# Altium PCB TEST.PcbDoc
Units mm, origin at the board's own origin, x right, y up, seen from the top; angles counter-clockwise.
Board outline 80.01 x 80.01 mm, 2 copper layers (Top Layer, Bottom Layer); 30 components, 30 nets, 145 pads, 219 vias.
Unrouted connection lines stored in the file: 1.
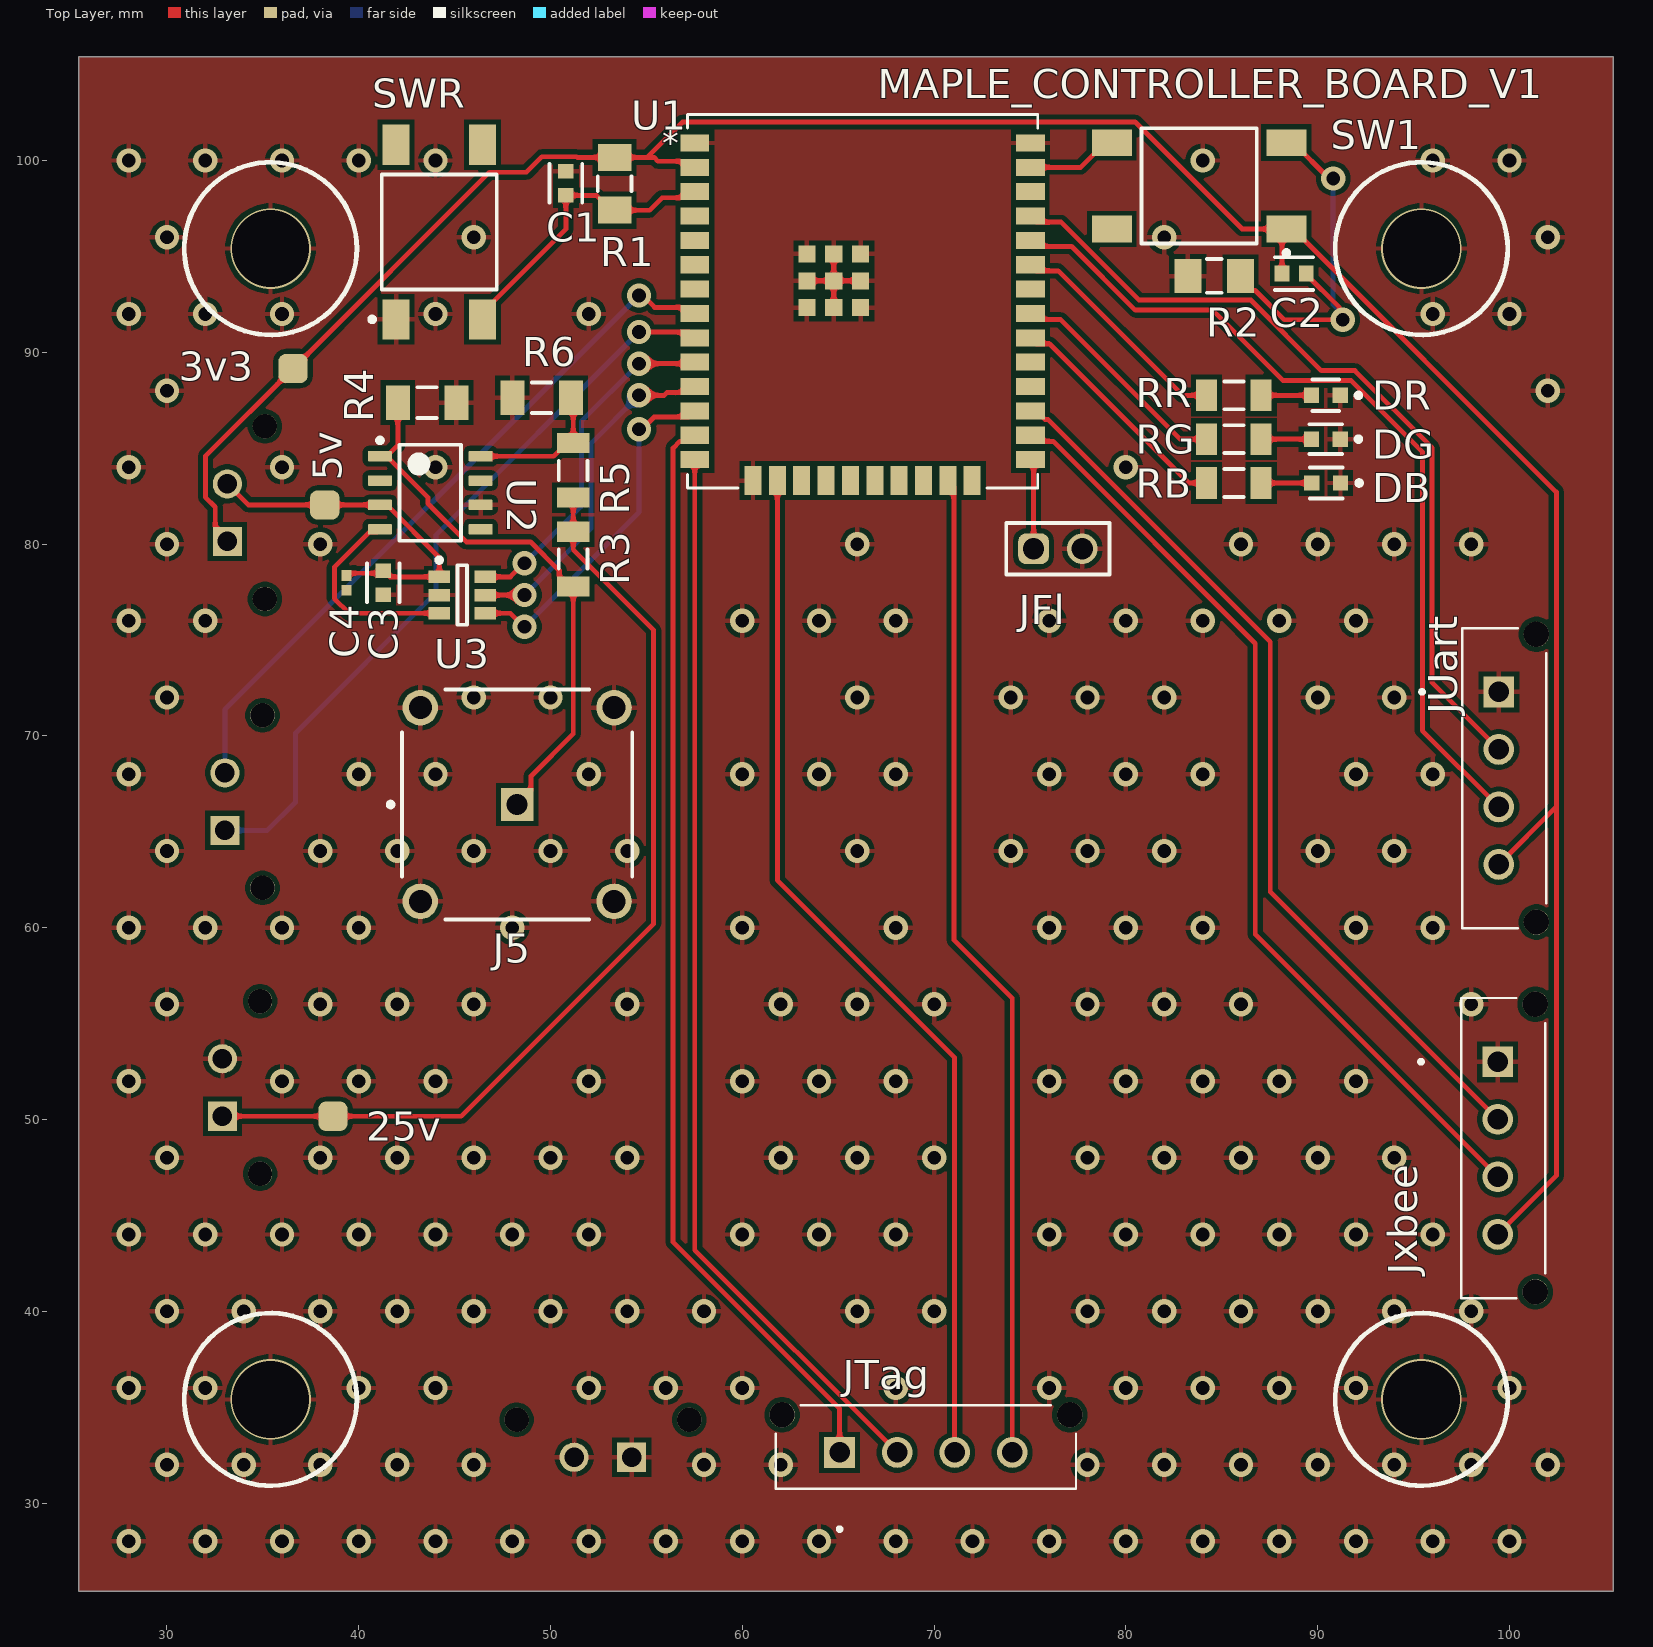
[diagram p0: Top Layer view]
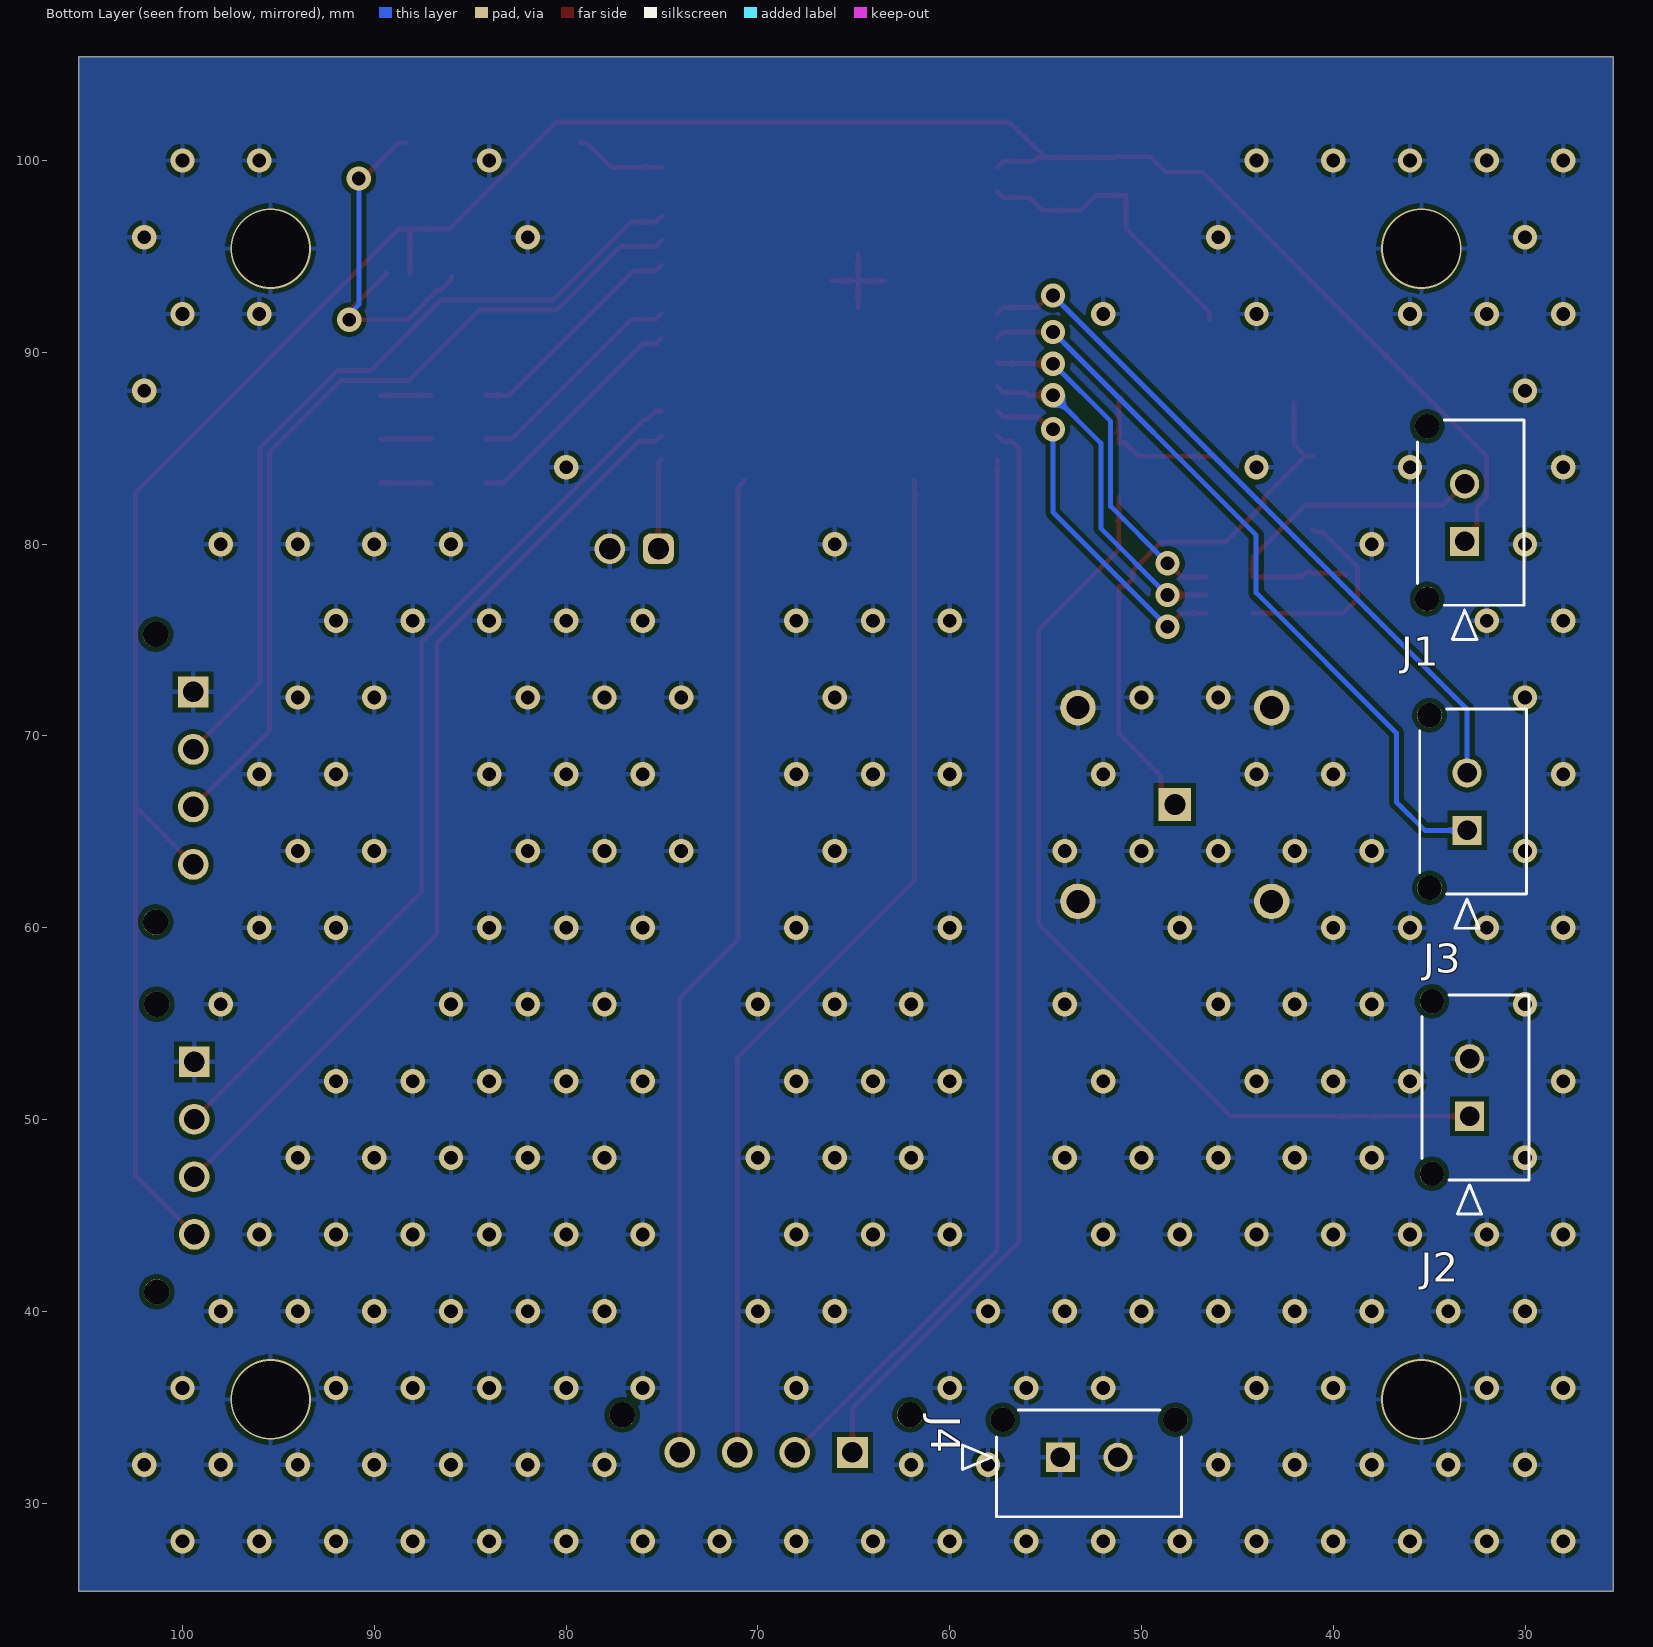
[diagram p1: Bottom Layer view, seen from below]
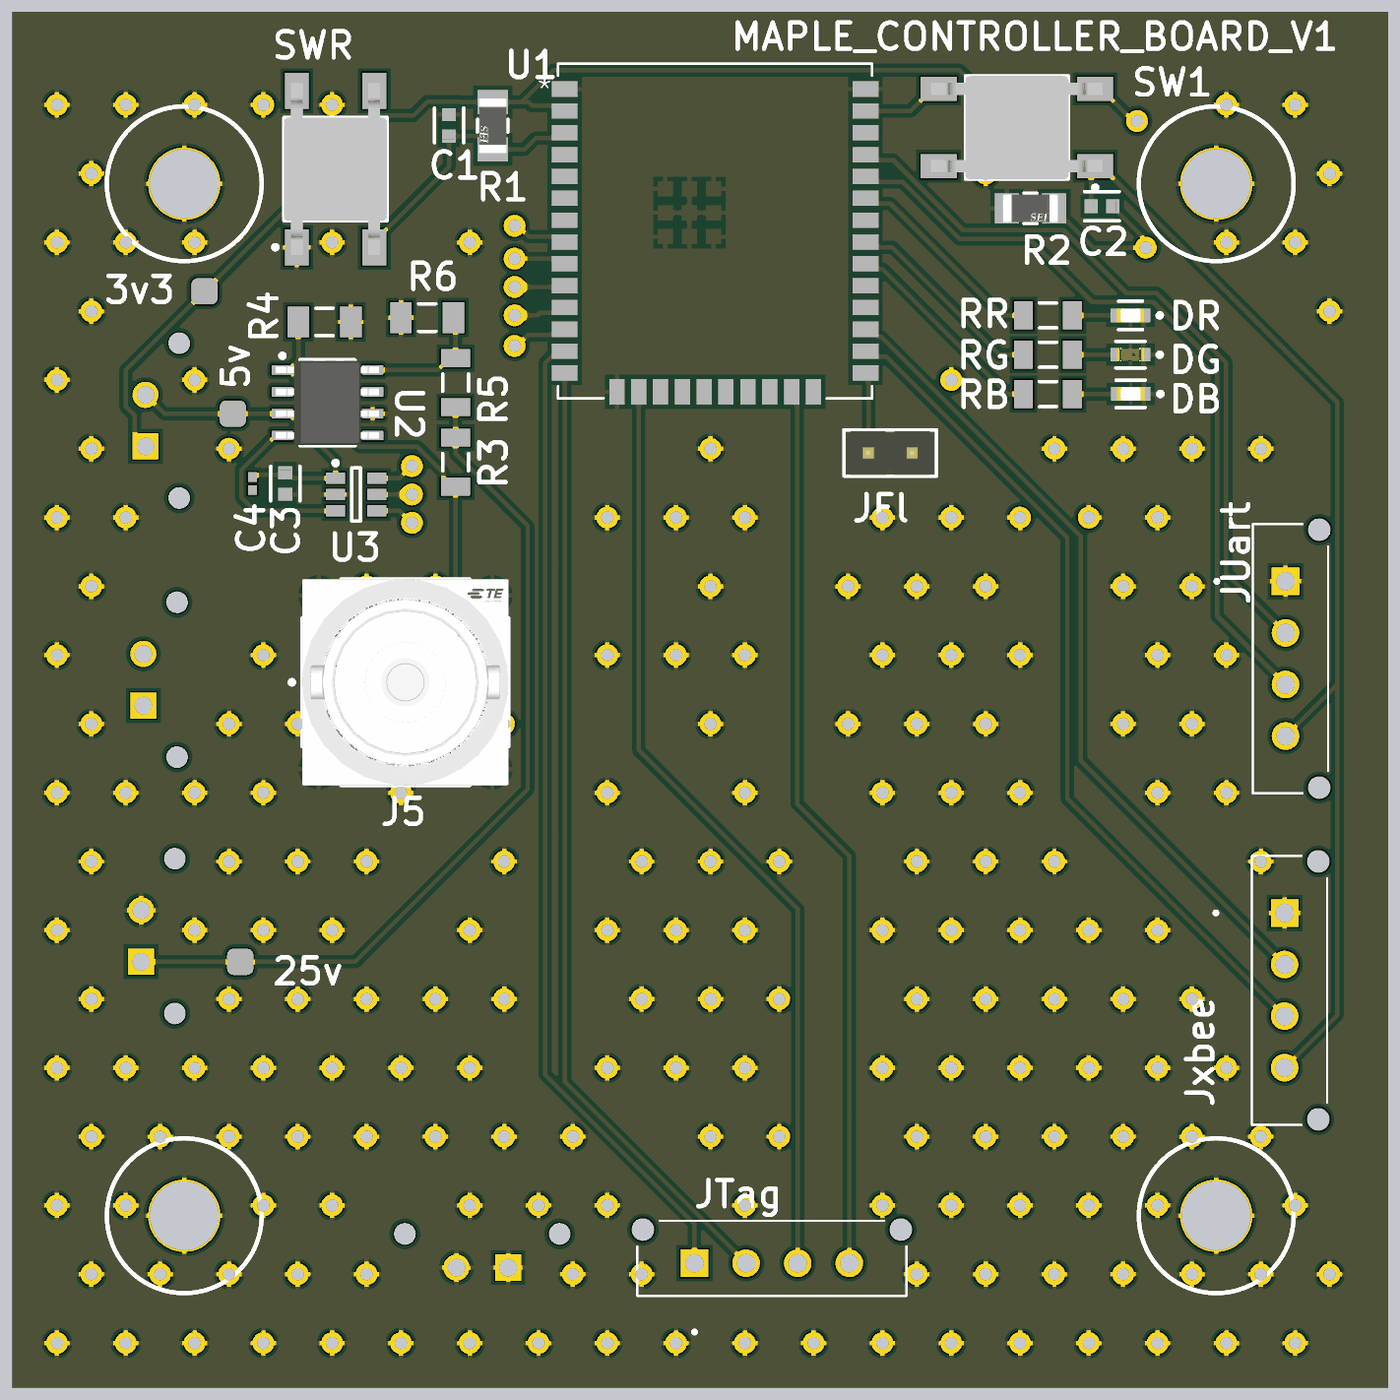
[diagram p2: 3D render of the assembled board from above, using the file's embedded part models]

## Layer stack, top to bottom
Top Solder: solder mask 0.0102, Solder Resist, Dk 3.5
Top Layer: signal copper 0.0356
Dielectric 1: dielectric 0.32, FR-4, Dk 4.8
Bottom Layer: signal copper 0.0356
Bottom Solder: solder mask 0.0102, Solder Resist, Dk 3.5

## Board outline
25.4,25.4 105.41,25.4 105.41,105.41 25.4,105.41

## Design rules (kind name [scope] priority, off if disabled: settings)
Clearance [All] p1: gap=0.254 ignorepadtopadclearanceinfootprint=FALSE except(0: Arc-Hole Track-Hole SMDPad-Hole THPad-Hole Via-Hole Fill-Hole Poly-Hole Region-Hole Text-Hole)
PolygonConnect [All] p1: connectstyle=Relief reliefconductorwidth=0.254 reliefentries=4 polygonreliefangle="90 Angle" airgapwidth=0.254
RoomDefinition MAPLE_CDH_Periph [InComponentClass('MAPLE_CDH_Periph')] p1: confinementstyle=ConfineIn formatcopy=TRUE lockcomponents=FALSE outline 0,0 50.8,0 50.8,25.4 0,25.4
RoomDefinition MAPLE_CDH_Cntrlr [InComponentClass('MAPLE_CDH_Cntrlr')] p2: confinementstyle=ConfineIn formatcopy=TRUE lockcomponents=FALSE outline 0,0 50.8,0 50.8,25.4 0,25.4
RoutingVias [All] p1: holewidth=0.711 width=1.27 viastyle="Through Hole" minholewidth=0.711 minwidth=1.27 maxholewidth=0.711 maxwidth=1.27
SolderMaskExpansion [All] p1: expansion=0.102 istentingtop=FALSE
Width [All] p1: maxlimit=0.254 minlimit=0.254 preferedwidth=0.254
30 further rules are at their usual default settings.

## Classes and differential pairs
component class MAPLE_CDH_Cntrlr: U1

## Components (designator, comment, footprint, x,y, rotation, side; value= is the part's Value field where it differs from the comment)
C1 "CL10A105KA8NNNC" FP-CL10-IPC_C 50.8,98.806 r270 top
C2 "CL10A105KA8NNNC" FP-CL10-IPC_C 88.765,94.107 r0 top
C3 "CL10A105KA8NNNC" FP-CL10-IPC_C 41.275,77.978 r270 top
C4 "CL03A104KQ3NNNC" CAPC0603X33X15ML03T05 39.37,77.978 r90 top
DB "LTST-C193TBKT-5A" FP-LTST-C193TBKT-5A-MFG 90.436,83.185 r180 top
DG "LTST-C193KGKT-5A" FP-LTST-C193KGKT-5A-MFG 90.424,85.471 r180 top
DR "LTST-C193KRKT-5A" FP-LTST-C193KRKT-5A-MFG 90.424,87.757 r180 top
J1 "436500227" CON_436500227_MOL 33.147,80.137 r270 bottom
J2 "436500227" CON_436500227_MOL 32.893,50.165 r270 bottom
J3 "436500227" CON_436500227_MOL 33.02,65.072 r270 bottom
J4 "436500227" CON_436500227_MOL 54.229,32.385 r0 bottom
J5 "1-1337445-0" FP-1-1337445-0-MFG 48.26,66.421 r0 top
JFl "61300211121" 61300211121 76.454,79.756 r0 top
JTag "0436500415" MOLEX_0436500415 69.572,32.639 r180 top
JUart "0436500415" MOLEX_0436500415 99.441,67.794 r90 top
Jxbee "0436500415" MOLEX_0436500415 99.386,48.507 r90 top
R1 "RMCF1206FT10K0" FP-RMCF1206-IPC_B 53.34,98.785 r270 top
R2 "RMCF1206FT10K0" FP-RMCF1206-IPC_B 84.603,93.98 r0 top
R3 "" RESC3116X65X40NL10T20 51.181,79.22 r90 top
R4 "" RESC3116X65X40ML10T20 43.561,87.376 r180 top
R5 "RC1206FR-0724K9L" RESC3116X65X40NL10T20 51.181,83.848 r270 top
R6 "RC1206FR-07100KL" RESC3116X65X40ML10T20 49.53,87.63 r0 top
RB "ERJ-8ENF1000V" RESC3216X70X50NL05T20 85.626,83.185 r0 top
RG "ERJ-8GEYJ271V" RESC3216X70X50NL05T20 85.626,85.471 r0 top
RR "ERJ-8GEYJ271V" RESC3216X70X50NL05T20 85.626,87.757 r0 top
SW1 "FSM4JSMA" TECO-FSM4JSMA_V 83.82,98.679 r270 top
SWR "FSM4JSMA" TECO-FSM4JSMA_V 44.196,96.266 r180 top
U1 "ESP32-WROOM-32UE-N16" ESP32-32UE_EXP 66.271,92.66 r0 top
U2 "THS4505DR" D0008A_L 43.73,82.677 r0 top
U3 "ADC121C027CIMK" MK06A_N 45.396,77.343 r0 top

## Footprints (in the part's own frame and the unit in brackets; to place one, negate y for a bottom-side part, rotate by r counter-clockwise, add the part's x,y. Pads: shape width x height; smd on the part's side, far side on the other; paste and mask are expansions set on the pad)
61300211121 [mm] "Pin Header, pitch 2.54 mm, THT, Vertical, single row, 2p"
  rrect50% 1.6x1.6 hole 1.1: 1(-1.27,0)
  round 1.6 hole 1.1: 2(1.27,0)
  silkscreen extent -2.69,-1.34 2.69,1.34, body extent -2.54,-1.27 2.54,1.27, height 8.57
CAPC0603X33X15ML03T05 [mm] "Chip Capacitor, 2-Leads, Body 0.60x0.30mm, IPC Low Density"
  rect 0.56x0.52 smd: 1(-0.38,0) 2(0.38,0)
  body extent -0.31,-0.17 0.32,0.16, height 0.33
CON_436500227_MOL [mm]
  rect 1.52x1.52 / inner round 1.524 / far side rect 1.52x1.52 hole 1.02 paste-0.76 mask+0.076: 1(0,0)
  round 1.52 / inner round 1.524 / far side round 1.52 hole 1.02 paste-0.76 mask+0.076: 2(-3,0)
  round 1.27 / inner round 1.524 / far side round 1.27 hole 1.27 unplated paste-0.635 mask+0.076: M1(3,-1.96) M2(-6,-1.96)
  silkscreen extent -6.33,-2.47 5.1,3.1
D0008A_L [mm] "SOIC, 8-Leads, Body 5x4mm, Pitch 1.27mm, IPC High Density"
  rrect18% 1.25x0.55 smd: 1(-2.625,1.905) 2(-2.625,0.635) 3(-2.625,-0.635) 4(-2.625,-1.905) 5(2.625,-1.905) 6(2.625,-0.635) 7(2.625,0.635) 8(2.625,1.905)
  silkscreen extent -2.75,-2.5 1.6,2.85, body extent -3,-2.45 3,2.45, height 1.63
ESP32-32UE_EXP [mil]
  rect 59x35 smd paste+0 mask+0: 1(-344.49,325) 2(-344.49,275) 3(-344.49,225) 4(-344.49,175) 5(-344.49,125) 6(-344.49,75) 7(-344.49,25) 8(-344.49,-25) 9(-344.49,-75) 10(-344.49,-125) 11(-344.49,-175) 12(-344.49,-225) 13(-344.49,-275) 14(-344.49,-325) 25(344.49,-325) 26(344.49,-275) 27(344.49,-225) 28(344.49,-175) 29(344.49,-125) 30(344.49,-75) 31(344.49,-25) 32(344.49,25) 33(344.49,75) 34(344.49,125) 35(344.49,175) 36(344.49,225) 37(344.49,275) 38(344.49,325)
  rect 35x59 smd paste+0 mask+0: 15(-225,-368.11) 16(-175,-368.11) 17(-125,-368.11) 18(-75,-368.11) 19(-25,-368.11) 20(25,-368.11) 21(75,-368.11) 22(125,-368.11) 23(175,-368.11) 24(225,-368.11)
  rect 35x35 smd paste-17.5 mask-17.5: 39(-59.22,42.08) 40(-114.34,97.2) 41(-114.34,42.08) 42(-114.34,-13.04) 43(-59.22,-13.04) 44(-59.22,97.2) 45(-4.11,97.2) 46(-4.11,42.08) 47(-4.11,-13.04)
  silkscreen extent -360,-383 359,383
FP-1-1337445-0-MFG [mm]
  rect 1.7x1.7 hole 1.1 paste-1000 mask+0: 1(0,0)
  round 1.85 hole 1.2 paste-1000 mask+0: 2(-5.05,5.05) 3(5.05,5.05) 4(-5.05,-5.05) 5(5.05,-5.05)
  silkscreen extent -6.72,-6 6,6, body extent -6.1,-6.1 6.1,6.1, height 0.25
FP-CL10-IPC_C [mm]
  rect 0.758x0.812 smd paste+0 mask+0: 1(-0.627,0) 2(0.627,0)
  silkscreen extent -1.01,-0.85 1.01,0.85, body extent -1.11,-0.55 1.11,0.55, height 0.25
FP-LTST-C193KGKT-5A-MFG [mm]
  rect 0.8x0.8 smd paste+0 mask+0: 1(-0.75,0) 2(0.75,0)
  silkscreen extent -1.83,-0.78 0.85,0.78, body extent -1.25,-0.55 1.25,0.55, height 0.25
FP-LTST-C193KRKT-5A-MFG [mm]
  rect 0.8x0.8 smd paste+0 mask+0: 1(-0.75,0) 2(0.75,0)
  silkscreen extent -1.83,-0.82 0.7,0.82, body extent -1.25,-0.55 1.25,0.55, height 0.25
FP-LTST-C193TBKT-5A-MFG [mm]
  rect 0.8x0.8 smd paste+0 mask+0: 1(-0.75,0) 2(0.75,0)
  silkscreen extent -1.85,-0.8 0.85,0.8, body extent -1.25,-0.55 1.25,0.55, height 0.25
FP-RMCF1206-IPC_B [mm]
  rect 1.404x1.758 smd paste+0 mask+0: 1(-1.376,0) 2(1.376,0)
  silkscreen extent -0.37,-0.88 0.37,0.88, body extent -2.33,-1.13 2.33,1.13, height 0.25
MK06A_N [mm] "SOT23, 6-Leads, Body 3.0x1.7mm, Pitch 0.95mm, Lead Span 2.9mm, IPC Medium Density"
  rect 1.1x0.65 smd: 1(-1.2,0.95) 2(-1.2,0) 3(-1.2,-0.95) 4(1.2,-0.95) 5(1.2,0) 6(1.2,0.95)
  silkscreen extent -1.32,-1.55 0.25,1.95, body extent -0.87,-1.53 0.87,1.54, height 1
MOLEX_0436500415 [mm]
  rect 1.605x1.605 hole 1.07: 1(4.5,0)
  round 1.605 hole 1.07: 2(1.5,0) 3(-1.5,0) 4(-4.5,0)
  round 1.32 hole 1.32 unplated: ""(-7.5,-1.96) ""(7.5,-1.96)
  silkscreen extent -7.83,-2.47 7.83,4.1
RESC3116X65X40ML10T20 [mm] "Chip Resistor, 2-Leads, Body 3.10x1.60mm, IPC Low Density"
  rect 1.25x1.8 smd: 1(-1.525,0) 2(1.525,0)
  silkscreen extent -0.5,-0.8 0.5,0.8, body extent -1.6,-0.85 1.6,0.85, height 0.65
RESC3116X65X40NL10T20 [mm] "Chip Resistor, 2-Leads, Body 3.10x1.60mm, IPC Medium Density"
  rect 1.05x1.7 smd: 1(-1.425,0) 2(1.425,0)
  silkscreen extent -0.5,-0.75 0.5,0.75, body extent -1.6,-0.85 1.6,0.85, height 0.65
RESC3216X70X50NL05T20 [mm] "Chip Resistor, 2-Leads, Body 3.20x1.60mm, IPC Medium Density"
  rect 1.1x1.65 smd: 1(-1.425,0) 2(1.425,0)
  silkscreen extent -0.5,-0.73 0.5,0.73, body extent -1.63,-0.82 1.62,0.82, height 0.7
TECO-FSM4JSMA_V [mm] "SMD, 4-Leads, Body 6x6mm, Pitch 4.5mm"
  rect 1.4x2.1 smd: 1(2.25,4.55) 2(2.25,-4.55) 3(-2.25,4.55) 4(-2.25,-4.55)
  silkscreen extent -3,-3 3.62,4.68, body extent -3,-5 3,5, height 5.08

## Part data
C1 C2 C3: library part CMP-13271-004127-1, "Cap Ceramic 1uF 25V X5R ±10% Pad SMD 0603 +85°C T/R", Capacitance=1uF, Case Code (Imperial)=0603, Case Code (Metric)=1608, Dielectric=X5R, Max Operating Temperature=85°C, Min Operating Temperature=-55°C, Package Quantity=1, Tolerance=10%, Voltage=25V, Case/Package=0603, Contact Plating=Tin, Depth=0.8mm, Height=0.8mm, Lead Free="Lead Free", Length=1.6mm, Material=Ceramic, Mount="Surface Mount", Packaging="Tape and Reel", Radiation Hardening=No, Thickness=0.035inch, Voltage Rating=25V, Voltage Rating (DC)=25V, Width=0.031inch
C4: library part CMP-2010-00674-1, Manufacturer=Samsung, Part Number=CL03A104KQ3NNNC
DB: library part CMP-2000-06624-2, "LED BLUE CLEAR CHIP SMD", Case Code (Imperial)=0603, Case Code (Metric)=1608, Color=Blue, Forward Current=20mA, Forward Voltage=2.8V, Lens Color=Colorless, Max Operating Temperature=80°C, Min Operating Temperature=-20°C, Package Quantity=1, Power Dissipation=76mW, Reverse Voltage=5V, Test Current=5mA, Case/Package=0603, Depth=0.8mm, Dominant Wavelength=475nm, Height=0.35mm, Illumination Color=Blue, Lead Free="Lead Free", Length=1.6mm, Lens Style=Diffused, Lens Transparency=Clear, Luminous Intensity=15mcd, Mount="Surface Mount", Number of Elements=1, Number of LEDs=1, Number of Pins=2, Packaging="Tape and Reel", Radiation Hardening=No, RoHS Compliant=Yes, Viewing Angle=130°, Width=0.8mm
DG: library part CMP-2000-06622-2, "LED GREEN CLEAR CHIP SMD", Case Code (Imperial)=0603, Case Code (Metric)=1608, Color=Green, Forward Current=30mA, Forward Voltage=2.3V, Lens Color=Colorless, Max Operating Temperature=85°C, Min Operating Temperature=-55°C, Package Quantity=3000, Power Dissipation=75mW, Reverse Voltage=5V, Test Current=5mA, Case/Package=0603, Depth=0.8mm, Dominant Wavelength=576.5nm, Height=0.35mm, Illumination Color=Green, Lead Free="Lead Free", Length=1.6mm, Lens Style=Diffused, Lens Transparency=Clear, Luminous Intensity=28mcd, Mount="Surface Mount", Number of Elements=1, Number of LEDs=1, Number of Pins=2, Packaging="Tape and Reel", Power Rating=75mW, Radiation Hardening=No, Viewing Angle=130°, Width=0.8mm
DR: library part CMP-2000-06623-2, "LED RED CLEAR CHIP SMD", Case Code (Imperial)=0603, Case Code (Metric)=1608, Color=Red, Forward Current=5mA, Forward Voltage=2.3V, Lens Color=Colorless, Max Operating Temperature=85°C, Min Operating Temperature=-55°C, Package Quantity=3000, Power Dissipation=50mW, Reverse Voltage=5V, Case/Package=0603, Depth=0.8mm, Dominant Wavelength=631nm, Height=0.35mm, Illumination Color=Red, Lead Free="Lead Free", Length=1.6mm, Lens Style=Diffused, Lens Transparency=Clear, Luminous Intensity=45mcd, Mount="Surface Mount", Number of Elements=1, Number of LEDs=1, Number of Pins=2, Packaging="Tape and Reel", Radiation Hardening=No, Test Current=5mA, Viewing Angle=130°, Width=0.8mm
J1 J2 J3 J4: "No Description Available", Mfr_Name="Molex Connector Corporation", Copyright="Copyright (C) 2023 Ultra Librarian. All rights reserved.", Digi-Key_Part_Number_1=WM10656-ND, Manufacturer_Part_Number=436500227, RefDes=RefDes, Type=DEV
J5: library part CMP-03357-000006-1, "CONN BNC JACK STR 50 OHM PCB", Dielectric Material=PTFE, Frequency=4GHz, Insulation Resistance=5GR, Max Operating Temperature=165°C, Min Operating Temperature=-65°C, Operating Frequency="0 to 4Hz", Package Quantity=50, Body Material=Brass, Body Plating=Silver, Connector Type=BNC, Contact Material=Brass, Contact Plating=Silver, Depth=12mm, ELV=Compliant, Fastening Type=Bayonet, Gender=Female, Impedance=50R, Insulation Material=Polytetrafluoroethylene, Length=12mm, Material=Brass, Max Frequency=4GHz, Mount="Through Hole", Number of Positions=1, Orientation=Straight, Packaging=Bag, PCB Mount Retention=With, PCB Mounting Orientation=Vertical, PCB Thickness=0.126inch, Radiation Hardening=No, RoHS Compliant=Yes, Sealable="No (Without)", Series=BNC, Termination=Solder
JFl: library part CMP-1712-00002-5, Color=Black, Contact Resistance=20mΩ, Current Rating=3A, Max Operating Temperature=125°C, Min Operating Temperature=-40°C, Operating Supply Voltage=250V, Connector Type="Male Pin", Contact Gender=Male, Contact Material=Copper, Contact Mating Length=5.9944mm, Contact Plating=Gold, Gender=Male, Height=8.94mm, Housing Material=PBT, Lead Free="Lead Free", Lead Pitch=2.54mm, Mount="Through Hole", NexarPartId=20081794, Number Of Contacts=2, Number of Pins=2, Number of Positions=2, Number Of Rows=1, Orientation=Vertical, Packaging=Bulk, Pitch=2.54mm, REACH SVHC="No SVHC", RoHS=Compliant, Termination="Through Hole", Voltage Rating=250V
JTag JUart Jxbee: "Connector Header Through Hole 4 position 0.118 (3.00mm)", Package=None, Availability=Unavailable, MF=Molex, MP=0436500415, Price=None, SnapEDA_Link=https://www.snapeda.com/parts/0436500415/Molex/view-part/425083/?ref=snap
R1 R2: library part CMP-26527-000151-1, "10kΩ ±1% 0.25W 1206 Thick Film Chip Resistor AEC-Q200 compliant", Case Code (Imperial)=1206, Case Code (Metric)=3216, Max Operating Temperature=155°C, Max Power Dissipation=250mW, Min Operating Temperature=-55°C, Resistance=10kR, Resistor Type="Thick Film", Temperature Coefficient=100ppm/°C, Tolerance=1%, Case/Package=1206, Construction=Rectangular, Contact Plating=Tin, Depth=1.6mm, Features="Automotive AEC-Q200", Height=0.028inch, Lead Free="Lead Free", Length=3.2mm, Military Standard=Not, Mount="Surface Mount", Number of Terminations=2, Packaging="Tape and Reel", Power Rating=250mW, Radiation Hardening=No, RoHS Compliant=Yes, Series=RMCF, Size Code=1206, Width=0.063inch
R3: library part CMP-2003-03636-1, Manufacturer=Yageo, Part Number=RC1206FR-0724K9L
R4 R6: library part CMP-2100-03674-1, "Chip Resistor, 100 KOhm, +/- 1%, 0.25 W, -55 to 155 degC, 1206 (3216 Metric), RoHS, Tape and Reel", Case Code (Imperial)=1206, Case Code (Metric)=3216, Manufacturer=Yageo, Max Operating Temperature=155degC, Min Operating Temperature=-55degC, Package Description="2-Pin Surface Mount Device, Body 3.1 x 1.6 mm", Package Reference=1206.0, Power Rating=250mW, Resistance=100KOhm, Temperature Coefficient=100ppm/degreesC, Tolerance=1%, Voltage Rating=200V, Case/Package=1206, Composition=ThickFilm, Datasheet URL=http://www.yageo.com/NewPortal/yageodocoutput?fileName=/pdf/R-Chip/PYu-RC_Group_51_RoHS_L_5.pdf, Datasheet Version="Rev. 5, 10/2016", Depth=1.6mm, Height=0.55mm, Lead Free=LeadFree, Length=3.1mm, Manufacturer URL=http://www.yageo.com/, Packaging=TapeandReel, REACH SVHC=NoSVHC, RoHSCompliant=true, Termination=SMD/SMT
R5: library part CMP-2003-03636-1, Manufacturer=Yageo, Part Number=RC1206FR-0724K9L
RB: library part CMP-2003-00016-1, Manufacturer=Panasonic, Part Number=ERJ-8ENF1000V
RG RR: library part CMP-2003-00597-1, Manufacturer=Panasonic, Part Number=ERJ-8GEYJ271V
SW1 SWR: library part CMP-2000-05602-2, "Swicth, SPST, 24 V, -35 to 85 degC, 4-Pin SMD, RoHS, Tape and Reel", Case\/Package=SMD/SMT, Contact Current Rating=50mA, Contact Resistance=100mOhm, Manufacturer="TE Connectivity", Max Operating Temperature=85degC, Max Voltage Rating (DC)=12V, Min Operating Temperature=-35degC, Operating Force=1.57N, Package Description="4-Pin Surface Mount Device, Body 6 x 6 mm, Pitch 4.5 mm", Package Quantity=750, Voltage Rating=24V, Actuator Length=0.055inch, Actuator Material=Polyamide, Contact Material=CopperAlloy, Contact Plating=Silver, Current Rating=50mA, Datasheet URL=http://www.te.com/commerce/DocumentDelivery/DDEController?Action=showdoc&DocId=Customer+Drawing%7F2-1437565-7%7FV%7Fpdf%7FEnglish%7FENG_CD_2-1437565-7_V.pdf%7F4-1437565-2, Datasheet Version="Rev. V, 02/2015", Electrical Life=100000Cycles, Illumination Type=Illuminated, Length=6mm, Manufacturer URL=http://www.te.com/, Mechanical Life=100000Cycles, Mount=SurfaceMount, Mounting Technology=SurfaceMount, Orientation=Straight, Package Reference=FSM4JSMA, Packaging=LoosePiece, REACH SVHC=Unknown, RoHSCompliant=true, Switch Travel=0.25mm, Termination=GullWing, Throw Configuration=SPST, Voltage Rating (DC)=24V, Width=6mm
U1: "No Description Available", Mfr_Name="Espressif Systems", Copyright="Copyright (C) 2023 Ultra Librarian. All rights reserved.", Manufacturer_Part_Number=ESP32-WROOM-32UE-N16, RefDes=RefDes, Type=DEV
U2: library part CMP-0811-00031-2, "Wideband, Low-Distortion Fully Differential Amplifier, 4.5 to 15 V, -40 to 85 degC, 8-pin SOIC (D8), Green (RoHS & no Sb/Br)", Manufacturer="Texas Instruments", Offset Voltage Drift (+/-)(Max)(uV/Degrees Celsius=10, 2nd Harmonic(dBc)=66, 3rd Harmonic(dBc)=65, @ MHz=30, BW @ Acl(MHz)=260, Code_JEDEC=MS-012, ComponentLink1Description="Manufacturer URL", ComponentLink1URL=http://www.ti.com/, ComponentLink2Description=Datasheet, ComponentLink2URL=http://www.ti.com/general/docs/lit/getliterature.tsp?genericPartNumber=THS4505&fileType=pdf, ComponentLink3Description="Package Specification", ComponentLink3URL=http://www.ti.com/litv/pdf/msoi002j, DatasheetVersion=SLOS363D, Eco-Plan="Green (RoHS & no Sb/Br)", Io(Typ)(mA)=100, Iq per channel(Max)(mA)=21, Mounting Technology="Surface Mount", Number of Channels=1, PackageDescription="8-Pin Plastic Small Outline, Body 4.9 x 3.9 mm, Pitch 1.27 mm", PackageReference=D0008A, PackageVersion="4040047-3/M, 06/2011", PartNumber=THS4505DR, Settling Time (0.1%)(Typ)(ns)=20, Slew Rate(Typ)(V/us)=1800, SubFamily="Fully Differential Amplifier", THD (Fc is 1 MHz)(Typ)(dB)=-78, Vio(Max)(mV)=-7, Vn at Flatband(Typ)(nV/rtHz)=8, Vs(Max)(V)=15, Vs(Min)(V)=4.5
U3: library part CMP-0054-00264-2, "I2C-Compatible, 12-Bit Analog-to-Digital Converter with Alert Function, 6-pin Tiny SOT23", Manufacturer="National Semiconductor", PackageTopMarking=X31C*XTT, PowerWise=Y, Code_IPC=SOT26A-6, Code_JEDEC=MO-193-AA, ComponentLink1Description="ADC121C027 Datasheet", ComponentLink1URL=http://www.national.com/ds/AD/ADC121C027.pdf, ComponentLink2Description="ADC121C027 Web Page", ComponentLink2URL=http://www.national.com/pf/AD/ADC121C027.html, ComponentLink3Description="MK06A Package Page", ComponentLink3URL=http://www.national.com/packaging/folders/mk06a.html, CompType="ADC IC", DatasheetVersion=Apr-2009, PackageDescription="Molded TSOT, 2.97 x 1.65 x 0.87mm Body, 6 Lead, 0.95mm Pitch", PackageReference=MK06A, PackageVersion="revE, Nov-2008", PinCount=6, RevisionNote="Component URLs added", RoHS=N

## Free pads (board coordinates)
  rrect50% 1.524x1.524 smd: 2(36.576,89.154) 3(38.227,82.042) 4(38.657,50.165)

## Via types
v1: diameter 1.27, hole 0.711, Top Layer to Bottom Layer, 215 vias
v2: diameter 4.2, hole 4, Top Layer to Bottom Layer, 4 vias

## Nets (pads, with @x,y where several pads share a name; then routed paths per layer and width w, separated by ;. In a path a pad name is that pad's centre, name@x,y a point inside that pad or via, vN(x,y) a via of type N, cw(c..) or ccw(c..) an arc to the next point about the centre after c; other vN are vias at no path point)
GND: C1.1 C3.2 C4.1 DB.1 DG.1 DR.1 J2.2 J4.1 J4.2 J5.2 J5.3 J5.4 J5.5 JFl.2 JUart.1 Jxbee.1 R2.1 R4.1 R6.1 SWR.1 U1.1 U1.15 U1.38 U1.39 U1.40 U1.41 U1.42 U1.43 U1.44 U1.45 U1.46 U1.47 U2.6 U3.2 | length 5.6
  Top Layer w0.254: U1.41 U1.39 ; U1.43 U1.39 ; U1.44 U1.39 ; U1.46 U1.39
  other v1: 28,28 32,28 36,28 40,28 44,28 48,28 52,28 56,28 60,28 64,28 68,28 72,28 76,28 80,28 84,28 88,28 92,28 96,28 100,28 30,32 34,32 38,32 42,32 46,32 58,32 62,32 78,32 82,32 86,32 90,32 94,32 98,32 102,32 28,36 32,36 40,36 44,36 52,36 56,36 60,36 68,36 76,36 80,36 84,36 88,36 92,36 100,36 30,40 34,40 38,40 42,40 46,40 50,40 54,40 58,40 66,40 70,40 78,40 82,40 86,40 90,40 94,40 98,40 28,44 32,44 36,44 40,44 44,44 48,44 52,44 60,44 64,44 68,44 76,44 80,44 84,44 88,44 92,44 96,44 30,48 38,48 42,48 46,48 50,48 54,48 62,48 66,48 70,48 78,48 82,48 86,48 90,48 94,48 28,52 36,52 40,52 44,52 52,52 60,52 64,52 68,52 76,52 80,52 84,52 88,52 92,52 30,56 38,56 42,56 46,56 54,56 62,56 66,56 70,56 78,56 82,56 86,56 98,56 28,60 32,60 36,60 40,60 48,60 60,60 68,60 76,60 80,60 84,60 92,60 96,60 30,64 38,64 42,64 46,64 50,64 54,64 66,64 74,64 78,64 82,64 90,64 94,64 28,68 40,68 44,68 52,68 60,68 64,68 68,68 76,68 80,68 84,68 92,68 96,68 30,72 46,72 50,72 66,72 74,72 78,72 82,72 90,72 94,72 28,76 32,76 60,76 64,76 68,76 76,76 80,76 84,76 88,76 92,76 30,80 38,80 66,80 86,80 90,80 94,80 98,80 28,84 36,84 44,84 80,84 30,88 102,88 28,92 32,92 36,92 44,92 52,92 96,92 100,92 30,96 46,96 82,96 102,96 28,100 32,100 36,100 40,100 44,100 84,100 96,100 100,100
  other v2: 35.4,35.4 95.41,35.4 35.4,95.41 95.41,95.41
NetC1_2: C1.2 R1.2 SWR.3 U1.3 | length 15.7
  Top Layer w0.254: SWR.3 46.446,92.066 50.8,96.42 C1.2 52.393,98.179 53.163,97.409 R1.2 55.171,97.409 55.82,98.058 57.204,98.058 U1.3
NetC2_1: C2.1 J1.1 JUart.4 Jxbee.4 pad.2 R1.1 SW1.1 U1.2 | length 140.1
  Top Layer w0.254: J1.1 32.514,80.77 32.514,81.936 32.006,82.444 32.006,84.584 pad.2 46.807,99.385 48.737,99.385 49.545,100.193 51.364,100.193 51.397,100.16 R1.1 55.034,100.16 ; U1.2 57.204,99.963 55.594,99.963 55.397,100.16 55.034,100.16 ; C2.1@88.145,94.114 C2.1 88.138,96.197 SW1.1 ; JUart.4@99.314,63.167 JUart.4 102.442,66.295 ; Jxbee.4 102.442,47.063 102.442,66.295 ; 55.034,100.16 56.883,102.01 80.478,102.01 86.059,96.429 SW1.1 ; SW1.1 88.72,96.429 102.442,82.707 102.442,66.295
NetC2_2: C2.2 R2.2 SW1.3 | length 20.4
  Top Layer w0.254: R2.2 85.979,93.803 86.554,93.228 86.731,93.228 88.265,91.694 v1(91.313,91.694) 91.119,91.888 91.119,92.353 89.392,94.08 C2.2 C2.2@89.392,94.134 ; SW1.3 88.72,100.929 90.589,99.06 v1(90.805,99.06)
  Bottom Layer w0.254: v1(90.805,99.06) 90.805,92.477 91.313,91.969 v1(91.313,91.694)
NetC3_1: C3.1 C4.2 J1.2 pad.3 U2.3 U3.1 | length 18.7
  Top Layer w0.254: J1.2 34.242,82.042 pad.3 U2.3 41.455,82.042 44.196,79.301 U3.1 41.614,78.293 41.302,78.605 C3.1 41.152,78.481 39.493,78.481 C4.2
NetDB_2: DB.2 RB.2 | length 2.6
  Top Layer w0.254: RB.2 DB.2
NetDG_2: DG.2 RG.2 | length 2.6
  Top Layer w0.254: RG.2 DG.2
NetDR_2: DR.2 RR.2 | length 2.6
  Top Layer w0.254: RR.2 DR.2
NetJ2_1: J2.1 pad.4 R3.2 R5.2 | length 50.6
  Top Layer w0.254: J2.1 pad.4 45.339,50.165 55.372,60.198 55.372,75.518 51.181,79.709 R3.2 R5.2
NetJ3_1: J3.1 U1.9 | length 40.2
  Top Layer w0.254: v1(54.61,91.059) 57.218,91.059 U1.9
  Bottom Layer w0.254: J3.1@33.653,65.705 J3.1 35.227,65.072 36.703,66.548 36.703,70.141 44.019,77.457 44.019,80.468 v1(54.61,91.059)
NetJ3_2: J3.2 U1.8 | length 37.1
  Top Layer w0.254: v1(54.61,92.964) 54.804,92.964 55.426,92.343 57.204,92.343 U1.8
  Bottom Layer w0.254: J3.2 33.02,71.374 v1(54.61,92.964)
NetJ5_1: J5.1 R3.1 R4.2 U2.1 | length 28.9
  Top Layer w0.254: U2.1 U2.1@41.455,84.582 ; R4.2 42.036,85.163 U2.1@41.455,84.582 ; J5.1 48.983,67.144 48.983,67.906 51.181,70.104 R3.1 50.856,77.795 50.458,78.193 50.458,78.614 48.956,80.116 45.601,80.116 43.602,82.115 43.602,82.435 U2.1@41.455,84.582
NetJFl_1: JFl.1 U1.25 | length 4.7
  Top Layer w0.254: U1.25 75.184,84.243 JFl.1
NetJTag_1: JTag.1 U1.13 | length 57.4
  Top Layer w0.254: U1.13 57.204,85.358 56.741,85.358 56.391,85.008 56.391,43.602 65.072,34.921 JTag.1
NetJTag_2: JTag.2 U1.14 | length 56.1
  Top Layer w0.254: U1.14 57.521,43.19 JTag.2
NetJTag_3: JTag.3 U1.16 | length 54.5
  Top Layer w0.254: U1.16 61.826,62.469 71.072,53.223 JTag.3
NetJTag_4: JTag.4 U1.23 | length 52.1
  Top Layer w0.254: U1.23 71.034,82.993 71.034,59.365 74.072,56.327 JTag.4
NetJUart_2: JUart.2 U1.35 | length 43.1
  Top Layer w0.254: U1.35 75.339,96.788 76.622,96.788 80.69,92.72 86.521,92.72 90.195,89.046 91.942,89.046 95.965,85.023 95.965,72.77 JUart.2
NetJUart_3: JUart.3 U1.34 | length 45.2
  Top Layer w0.254: U1.34 75.339,95.518 77.174,95.518 80.49,92.202 84.52,92.202 88.184,88.538 91.732,88.538 95.457,84.813 95.457,70.278 JUart.3
NetJxbee_2: Jxbee.2 U1.27 | length 47.3
  Top Layer w0.254: U1.27 75.326,86.945 75.771,86.501 75.928,86.501 87.528,74.901 87.528,61.865 Jxbee.2
NetJxbee_3: Jxbee.3 U1.26 | length 49.3
  Top Layer w0.254: U1.26 75.339,85.358 76.205,85.358 86.746,74.816 86.746,59.647 Jxbee.3
NetR5_1: R5.1 R6.2 U2.8 | length 7.5
  Top Layer w0.254: U2.8 50.165,84.582 50.856,85.273 R5.1 51.181,87.504 R6.2
NetRB_1: RB.1 U1.30 | length 12.3
  Top Layer w0.254: U1.30 75.339,90.438 76.017,90.438 83.27,83.185 RB.1
NetRG_1: RG.1 U1.31 | length 11.9
  Top Layer w0.254: U1.31 75.339,91.708 76.592,91.708 82.829,85.471 RG.1
NetRR_1: RR.1 U1.33 | length 12
  Top Layer w0.254: U1.33 75.339,94.248 76.465,94.248 82.956,87.757 RR.1
NetSW1_4: SW1.4 U1.37 | length 4.8
  Top Layer w0.254: U1.37 77.636,99.645 78.92,100.929 SW1.4
NetU1_10: U1.10 U3.6 | length 18.2
  Top Layer w0.254: U3.6 47.905,78.293 48.606,78.994 v1(48.641,78.994) ; v1(54.61,89.408) 57.444,89.408 U1.10
  Bottom Layer w0.254: v1(48.641,78.994) 51.61,81.963 51.61,86.408 v1(54.61,89.408)
NetU1_11: U1.11 U3.5 | length 18
  Top Layer w0.254: U3.5 v1(48.641,77.343) ; v1(54.61,87.757) 55.919,87.757 56.06,87.898 57.204,87.898 U1.11
  Bottom Layer w0.254: v1(48.641,77.343) 52.118,80.82 52.118,85.265 v1(54.61,87.757)
NetU1_12: U1.12 U3.4 | length 18.4
  Top Layer w0.254: U3.4 47.905,76.393 48.606,75.692 v1(48.641,75.692) ; v1(54.61,85.979) 54.749,85.979 55.398,86.628 57.204,86.628 U1.12
  Bottom Layer w0.254: v1(48.641,75.692) 54.61,81.661 v1(54.61,85.979)
NetU2_4: U2.4 U3.3 | length 10.6
  Top Layer w0.254: U2.4 40.957,80.624 40.557,80.624 38.729,78.796 38.729,77.16 39.496,76.393 U3.3
pads on no net: J1.M1 J1.M2 J2.M1 J2.M2 J3.M1 J3.M2 J4.M1 J4.M2 JTag. JUart. Jxbee. SW1.2 SWR.2 SWR.4 U1.4 U1.5 U1.6 U1.7 U1.17 U1.18 U1.19 U1.20 U1.21 U1.22 U1.24 U1.28 U1.29 U1.32 U1.36 U2.2 U2.5 U2.7

## Polygon pours and split planes (outlines as drawn)
GND on Top Layer "GND_L01_P000" (solid, pour order 0): 25.4,105.41 105.41,105.41 105.41,25.4 25.4,25.4
GND on Bottom Layer "GND_L02_P001" (solid, pour order 1): 25.4,105.41 105.41,105.41 105.41,25.4 25.4,25.4

## Silkscreen, mask and mechanical layers (free items; w line width, h text height)
Top Overlay:
  circle w0.254: c35.4,95.41 r4.5
  circle w0.254: c95.41,35.4 r4.5
  circle w0.254: c95.41,95.41 r4.5
  circle w0.254: c35.4,35.4 r4.5
  text "MAPLE_CONTROLLER_BOARD_V1" at 67.056,103.251 h1.52
  text "3v3" at 30.607,88.519 h1.52
  text "5v" at 39.116,83.312 h1.52 r90
  text "25v" at 40.386,48.895 h1.52

## Text inside footprints (layer, text, board x,y; h text height)
U1: Top 3D Body "*" at 58.588,100.28 h1.27; Top Overlay "*" at 55.819,100.28 h1.27